# EAGLE board semi-controlled-rectifier-breakout-board_THERMAL_REWORK (EAGLE 9.6.2)
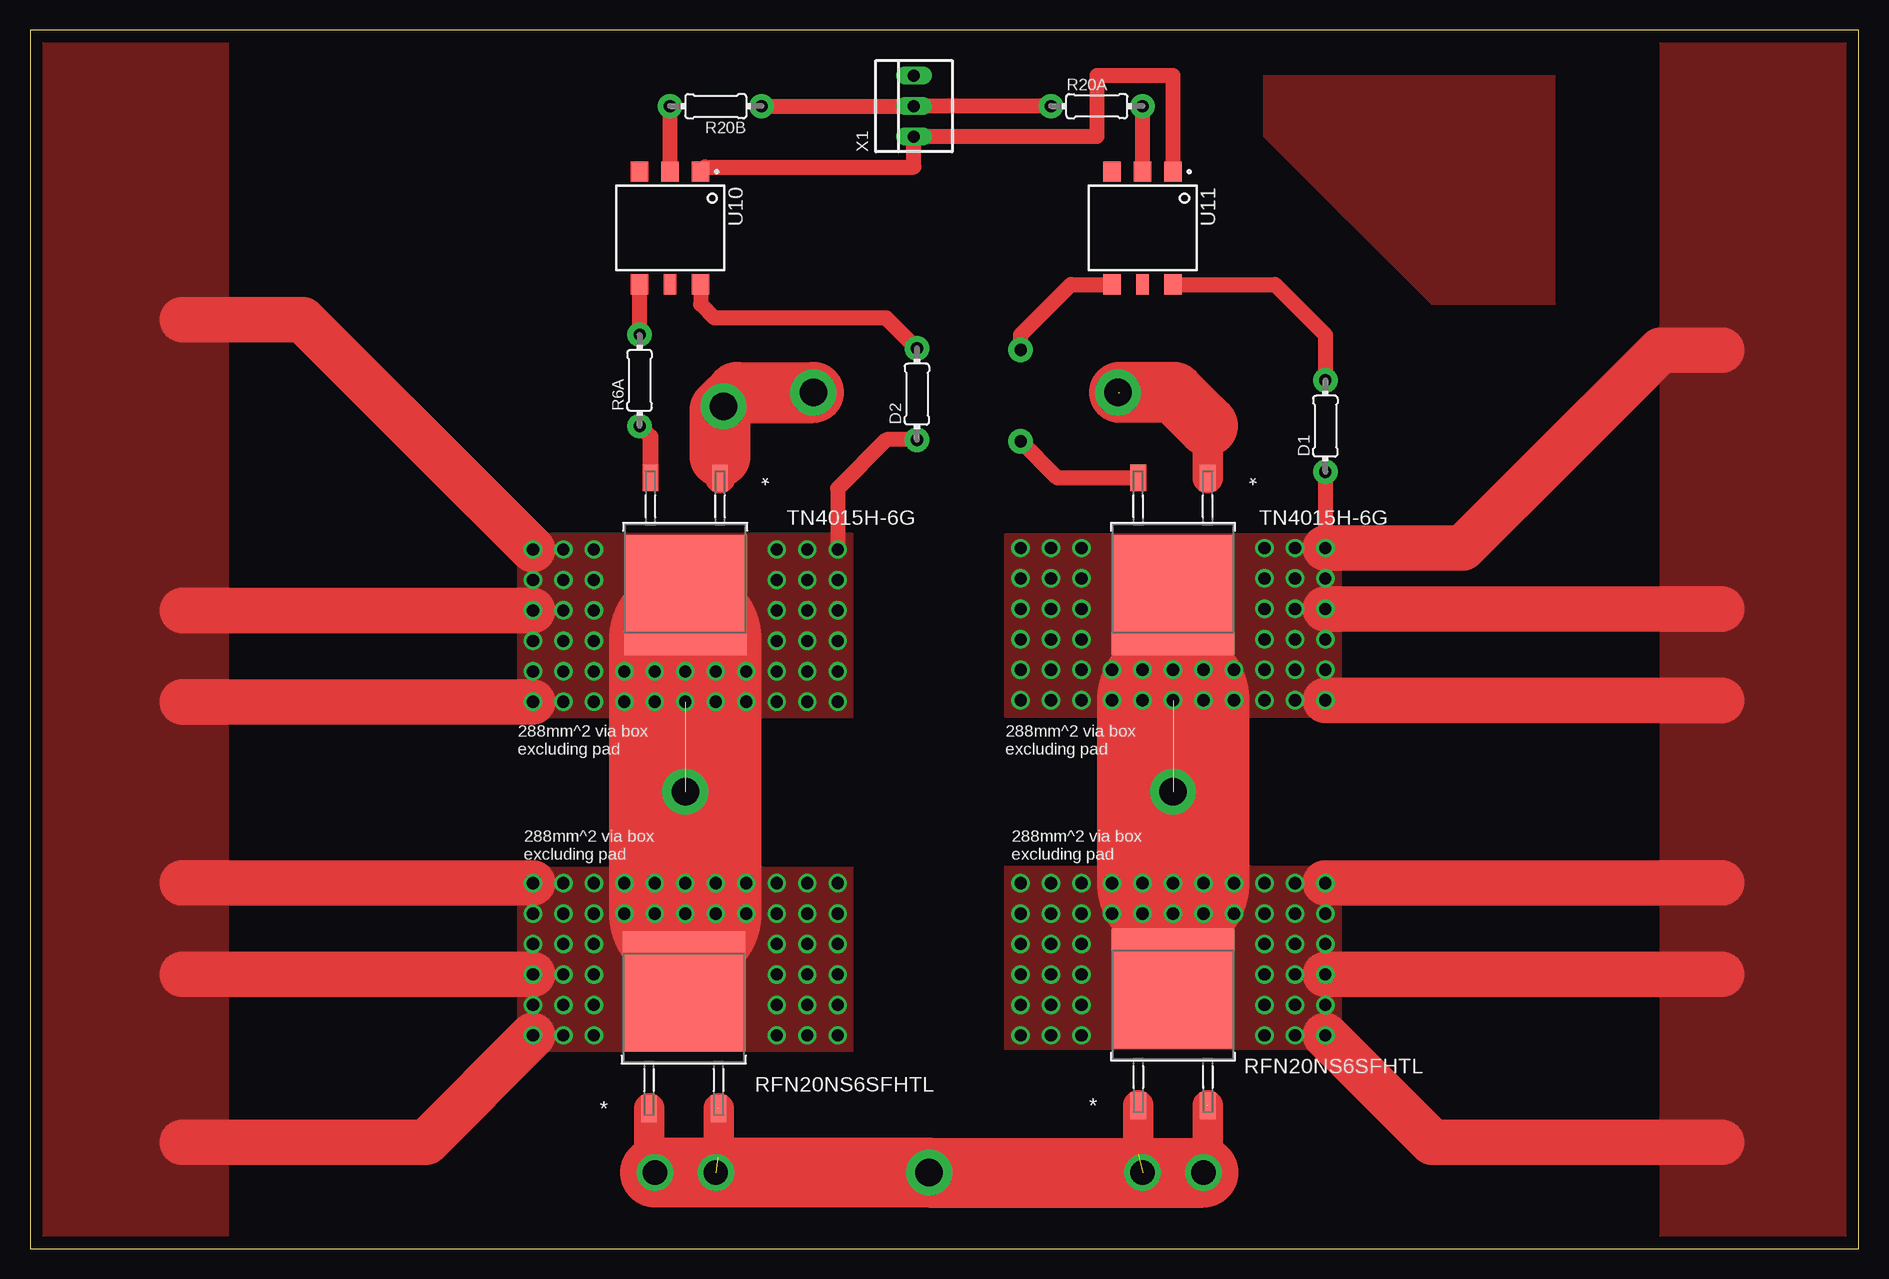
[diagram p0: board, top side]
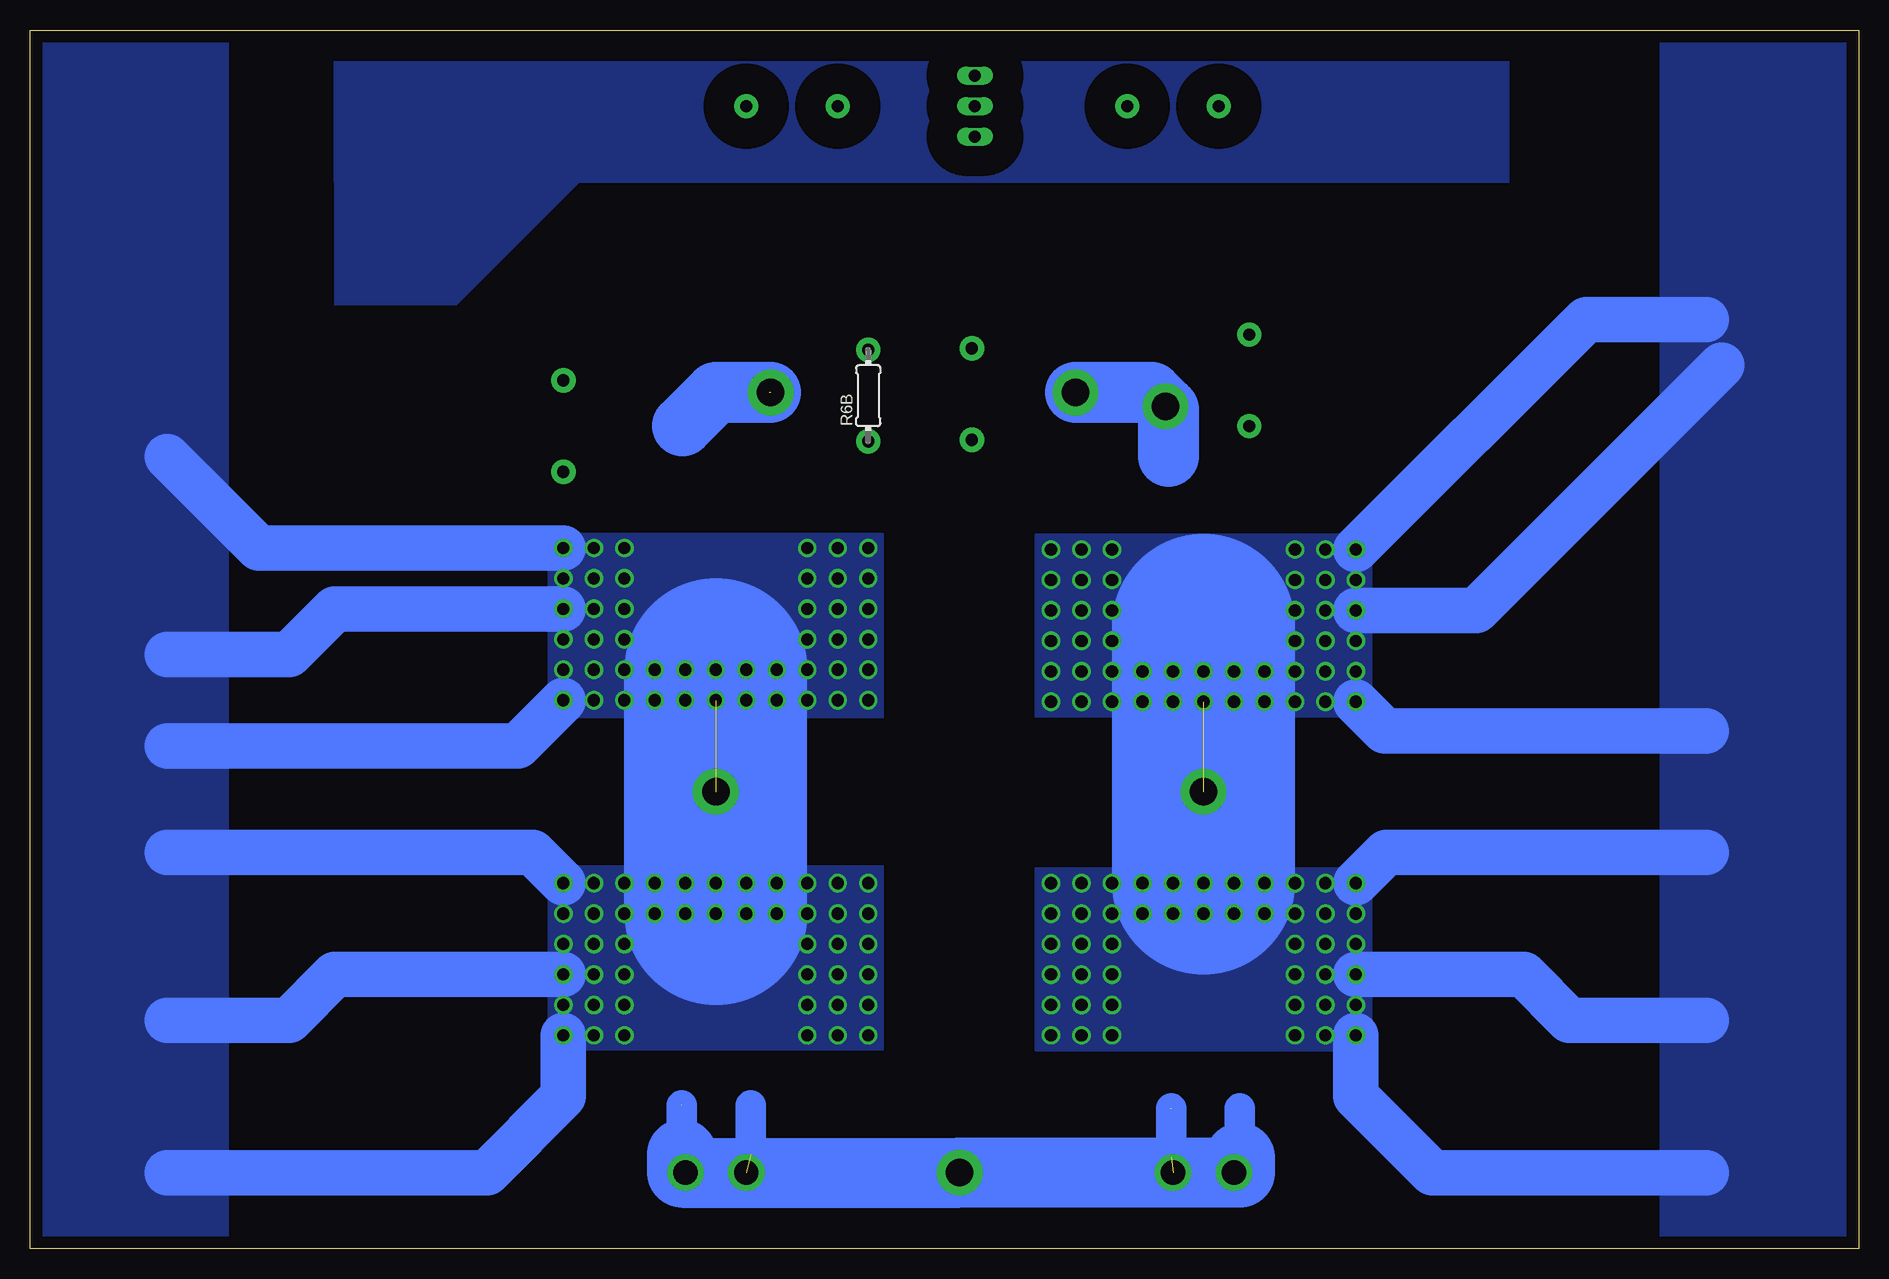
[diagram p1: board, bottom side, seen from below]

Size 152.4 x 101.6 mm. Coordinates in mm from the lower left corner, seen from the top.
Outline: 152.4,0 152.4,101.6 0,101.6 0,0 152.4,0
Copper layers (1*16): Top 0.035mm / dielectric 1.5mm / Bottom 0.035mm
Design rules "default": minimum track width 6mil, minimum drill 0.35mm, track to track 6mil, track to pad 6mil, pad to pad 6mil, via to via 6mil, smd to smd 6mil, copper to edge 40mil, drill to drill 6mil, minimum pad ring 10mil, minimum via ring 8mil, stop-mask expansion 4mil, vias tented up to drill 0mil, thermal gap 10mil

## Footprints (pad centres in the part's own frame; a part is rotated, then mirrored left to right if it is on the bottom)
0204/7_TH = drill 1.016 pad 2.032: P$1 -3.81,0; P$2 3.81,0
DIO_RFN10N_ROM-M = smd 1.321 x 2.21: 1 -2.896,-8.369; 2 2.896,-8.369 | smd 10.211 x 10.008: 3 0,1.372
SOIC254P1030X460-6N = smd 1.7 x 1.45: 1 -4.7,2.54; 2 -4.7,0; 3 -4.7,-2.54; 4 4.7,-2.54; 6 4.7,2.54 | smd 1.7 x 1.018: 5 4.7,0
90MIL_TERMINAL = drill 2.286 pad 3.81: 1 0,0
1000MIL_JUMPER = drill 2.286 pad 3.81: 1 -12.7,0; 2 12.7,0
22-23-2031 = drill 1 long: 1 -2.54,0; 2 0,0; 3 2.54,0

## Placement (x,y rotation side)
D1  DIODE  [0204/7_TH]  107.95,68.58 90 top
D2  DIODE  [0204/7_TH]  73.91,71.25 90 top
D8  RFN20NS6SFHTL  [DIO_RFN10N_ROM-M]  54.48,20.07 0 top
D9  RFN20NS6SFHTL  [DIO_RFN10N_ROM-M]  95.25,20.32 0 top
R6A  180  [0204/7_TH]  50.8,72.39 90 top
R6B  180  [0204/7_TH]  82.55,71.12 90 bottom
R20A  200  [0204/7_TH]  88.9,95.25 0 top
R20B  200  [0204/7_TH]  57.15,95.25 180 top
U8  TN4015H-6G  [DIO_RFN10N_ROM-M]  54.61,55.88 180 top
U9  TN4015H-6G  [DIO_RFN10N_ROM-M]  95.25,55.88 180 top
U10  VO3053-X007T  [SOIC254P1030X460-6N]  53.34,85.09 270 top
U11  VO3053-X007T  [SOIC254P1030X460-6N]  92.71,85.09 270 top
U$1  90MIL_TERMINAL  [90MIL_TERMINAL]  54.61,38.1 0 top
U$2  90MIL_TERMINAL  [90MIL_TERMINAL]  95.25,38.1 0 top
U$3  90MIL_TERMINAL  [90MIL_TERMINAL]  57.78,70.23 0 top
U$4  90MIL_TERMINAL  [90MIL_TERMINAL]  74.93,6.35 0 top
U$5  1000MIL_JUMPER  [1000MIL_JUMPER]  77.98,71.37 180 top
X1  22-23-2031  [22-23-2031]  73.66,95.25 90 top

## Library data of the parts
D1 D2 R6A R6B R20A R20B U8-U11 U$1-U$5 = RectifierParts
D8 D9 = RectifierParts; COPYRIGHT: Copyright (C) 2022 Ultra Librarian. All rights reserved.; DIGI-KEY_PART_NUMBER_1: RFN20NS6SFHTLCT-ND; DIGI-KEY_PART_NUMBER_2: RFN20NS6SFHTLDKR-ND; DIGI-KEY_PART_NUMBER_3: RFN20NS6SFHTLTR-ND; MANUFACTURER_PART_NUMBER: RFN20NS6SFHTL; MFR_NAME: ROHM Semiconductor
X1 = con-molex; MF: MOLEX; MPN: 22-23-2031; OC_FARNELL: 1462950; OC_NEWARK: 30C0862

## Nets
+5VDC: U10.1 U11.1 X1.1
DC+: U8.1 U$3.1 U$5.2
DC-: D8.1 D8.2 D9.1 D9.2 U$4.1
N$1: U9.1 U$5.1
N$2: R6A.P$2 U10.4
N$3: D1.P$2 U11.6
N$4: R6B.P$2 U11.4
N$5: R6A.P$1 U8.2
N$6: R6B.P$1 U9.2
N$7: R20A.P$2 U11.2
N$8: R20B.P$2 U10.2
N$9: D2.P$2 U10.6
P1_FUSED: D2.P$1 D8.3 U8.3 U$1.1
P2_IN: D1.P$1 D9.3 U9.3 U$2.1
PHASE_CONTROL_SIGNAL: R20A.P$1 R20B.P$1 X1.2

## Tracks (layer width: path | path; a pad name or v marks a point on that pad's centre or on a via)
+5VDC
  Top 1.27: U10.1 56.26,90.17 73.66,90.17 X1.1 88.9,92.71 88.9,97.79 95.25,97.79 U11.1
DC+
  Top 2.54: U8.1 57.51,66.04
  Top 5.08: 57.51,66.04 57.51,69.95 U$3.1 58.93,71.37 U$5.2
  Bottom 5.08: U$5.2 58.93,71.37 U$3.1 57.53,69.98 57.53,66.04
DC-  (via drill 2.03)  (4 unrouted)
  Top 2.54: D9.2 98.15,8.89 | D9.1 92.35,8.89 | D8.1 51.59,7.62 | D8.2 57.38,8.89
  Top 5.842: v97.79,6.35 v92.71,6.35 U$4.1 v57.15,6.35 v52.07,6.35
  Bottom 2.54: D8.1 51.59,7.62 | 57.3,11.7 57.3,7.62 | D9.1 92.35,7.87 | 98.07,11.95 98.07,7.87
  Bottom 5.842: 51.59,7.62 51.59,6.35 v52.07,6.35 v57.15,6.35 U$4.1 v92.71,6.35 v97.79,6.35 98.07,6.35 98.07,7.87
N$1  (1 unrouted)
  Top 2.54: U9.1 98.15,68.58
  Top 5.08: 98.15,68.58 95.35,71.37 90.81,71.37
  Bottom 5.08: U$5.1 95.25,71.37 98.04,68.58
N$2
  Top 1.27: R6A.P$2 U10.4
N$3
  Top 1.27: U11.6 103.76,80.39 107.95,76.2 D1.P$2
N$4
  Top 1.27: R6B.P$2 82.55,76.2 86.74,80.39 U11.4
N$5
  Top 1.27: 51.71,67.67 R6A.P$1
  Top 1.321: U8.2 51.71,67.67
N$6
  Top 1.27: U9.2 85.61,64.25 R6B.P$1
N$7
  Top 1.27: U11.2 R20A.P$2
N$8
  Top 1.27: U10.2 R20B.P$2
N$9
  Top 1.27: U10.6 55.88,78.74 57.02,77.6 71.37,77.6 D2.P$2
NC
  pour Bottom: 102.87,97.79 127,97.79 127,78.74 116.84,78.74 102.87,92.71
  pour Top: 102.87,97.79 127,97.79 127,78.74 116.84,78.74 102.87,92.71
  pour Bottom (isolate 2.54): 29.21,101.6 29.21,88.9 127,88.9 127,101.6
P1_FUSED  (via drill 1.02)  (1 unrouted)
  Top 1.27: D2.P$1 71.37,67.44 67.31,63.37 v67.31,58.29
  Top 12.7: v54.61,27.94 54.61,50.8
  Top 3.81: v41.91,58.29 22.73,77.47 12.7,77.47 | v41.91,53.21 12.7,53.21 | v41.91,45.59 12.7,45.59 | v41.91,30.48 12.7,30.48 | v41.91,22.86 12.7,22.86 | v41.91,17.78 33.02,8.89 12.7,8.89
  Bottom 15.24: 54.61,51.97 v54.61,30.48
  Bottom 3.81: v41.91,58.29 22.73,77.47 12.7,77.47 | v41.91,53.21 31.88,53.21 11.43,73.66 | v41.91,45.59 39.5,43.18 12.7,43.18 | v41.91,30.48 39.37,33.02 12.7,33.02 | v41.91,22.86 27.94,22.86 24.13,19.05 12.7,19.05 | v41.91,17.78 41.91,12.7 35.56,6.35 12.7,6.35
  other vias: 46.99,17.78 44.45,17.78 41.91,20.32 44.45,20.32 46.99,20.32 46.99,22.86 44.45,22.86 41.91,25.4 44.45,25.4 46.99,25.4 46.99,27.94 44.45,27.94 41.91,27.94 44.45,30.48 46.99,30.48 49.53,30.48 49.53,27.94 52.07,27.94 52.07,30.48 57.15,27.94 57.15,30.48 59.69,30.48 59.69,27.94 62.23,27.94 62.23,30.48 64.77,30.48 64.77,27.94 62.23,25.4 64.77,25.4 64.77,22.86 62.23,22.86 62.23,20.32 64.77,20.32 64.77,17.78 62.23,17.78 67.31,17.78 67.31,20.32 67.31,22.86 67.31,25.4 67.31,27.94 67.31,30.48 62.23,58.29 64.77,58.29 67.31,55.75 64.77,55.75 62.23,55.75 62.23,53.21 64.77,53.21 67.31,53.21 67.31,50.67 64.77,50.67 62.23,50.67 62.23,48.13 64.77,48.13 67.31,48.13 67.31,45.59 64.77,45.59 62.23,45.59 59.69,45.59 59.69,48.13 57.15,48.13 57.15,45.59 54.61,45.59 54.61,48.13 52.07,48.13 52.07,45.59 49.53,45.59 49.53,48.13 46.99,48.13 46.99,45.59 44.45,45.59 44.45,48.13 46.99,50.67 44.45,50.67 44.45,53.21 46.99,53.21 46.99,55.75 44.45,55.75 44.45,58.29 46.99,58.29 41.91,55.75 41.91,50.67 41.91,48.13
  pour Top (rank 2, no thermals): 40.64,16.51 68.58,16.51 68.58,31.75 40.64,31.75
  pour Bottom (rank 2, no thermals): 40.64,16.51 68.58,16.51 68.58,31.75 40.64,31.75
  pour Top (rank 2, no thermals): 68.58,59.56 40.64,59.56 40.64,44.32 68.58,44.32
  pour Bottom (rank 2, no thermals): 68.58,59.56 40.64,59.56 40.64,44.32 68.58,44.32
  pour Top: 0,101.6 0,0 16.51,0 16.51,101.6
  pour Bottom: 0,101.6 0,0 16.51,0 16.51,101.6
P2_IN  (via drill 1.02)  (1 unrouted)
  Top 1.27: D1.P$1 v107.95,58.42
  Top 12.7: v95.25,30.48 v95.25,45.72
  Top 3.81: v107.95,17.78 116.84,8.89 140.97,8.89 | v107.95,22.86 140.97,22.86 | v107.95,30.48 140.97,30.48 | v107.95,45.72 140.97,45.72 | v107.95,53.34 140.97,53.34 | v107.95,58.42 119.38,58.42 135.89,74.93 140.97,74.93
  Bottom 15.24: v95.25,27.94 v95.25,48.26
  Bottom 3.81: v107.95,17.78 107.95,12.7 114.3,6.35 140.97,6.35 | 140.97,19.05 130.81,19.05 127,22.86 v107.95,22.86 | 140.97,33.02 110.49,33.02 v107.95,30.48 | 140.97,41.91 111.76,41.91 v107.95,45.72 | 140.97,49.53 130.81,49.53 127,53.34 v107.95,53.34 | v107.95,58.42 133.35,58.42 140.97,66.04
  other vias: 87.63,58.42 87.63,55.88 85.09,55.88 85.09,58.42 82.55,58.42 82.55,55.88 82.55,53.34 85.09,53.34 87.63,53.34 87.63,50.8 85.09,50.8 82.55,50.8 82.55,48.26 85.09,48.26 87.63,48.26 87.63,45.72 85.09,45.72 82.55,45.72 90.17,48.26 90.17,45.72 92.71,45.72 92.71,48.26 97.79,45.72 97.79,48.26 100.33,48.26 100.33,45.72 102.87,45.72 102.87,48.26 105.41,48.26 105.41,45.72 107.95,50.8 107.95,48.26 105.41,50.8 102.87,50.8 102.87,53.34 105.41,53.34 107.95,55.88 105.41,55.88 102.87,55.88 102.87,58.42 105.41,58.42 102.87,17.78 102.87,20.32 105.41,20.32 105.41,17.78 107.95,20.32 105.41,22.86 102.87,22.86 102.87,25.4 105.41,25.4 107.95,25.4 107.95,27.94 105.41,27.94 102.87,27.94 102.87,30.48 105.41,30.48 100.33,27.94 100.33,30.48 97.79,30.48 97.79,27.94 92.71,30.48 92.71,27.94 90.17,27.94 90.17,30.48 87.63,30.48 87.63,27.94 85.09,27.94 85.09,30.48 82.55,30.48 82.55,25.4 82.55,27.94 85.09,25.4 87.63,25.4 87.63,22.86 85.09,22.86 82.55,22.86 82.55,20.32 85.09,20.32 87.63,20.32 87.63,17.78 85.09,17.78 82.55,17.78
  pour Top (no thermals): 81.28,59.56 109.22,59.56 109.22,44.32 81.28,44.32
  pour Bottom (no thermals): 81.28,59.56 109.22,59.56 109.22,44.32 81.28,44.32
  pour Top (rank 2, no thermals): 109.22,16.64 81.28,16.64 81.28,31.88 109.22,31.88
  pour Bottom (no thermals): 109.22,16.64 81.28,16.64 81.28,31.88 109.22,31.88
  pour Top: 152.4,101.6 152.4,0 135.89,0 135.89,101.6
  pour Bottom: 152.4,101.6 152.4,0 135.89,0 135.89,101.6
PHASE_CONTROL_SIGNAL
  Top 1.27: R20B.P$1 X1.2 R20A.P$1

## Text on the board
tPlace: 288mm^2 via box / excluding pad | 288mm^2 via box / excluding pad | 288mm^2 via box / excluding pad | 288mm^2 via box / excluding pad